# Altium PCB PCB1.PcbDoc
Units mm, origin at the board's own origin, x right, y up, seen from the top; angles counter-clockwise.
Board outline 168.1 x 142.58 mm, 2 copper layers (Top Layer, Bottom Layer); 4 components, 0 nets, 4 pads, 0 vias.
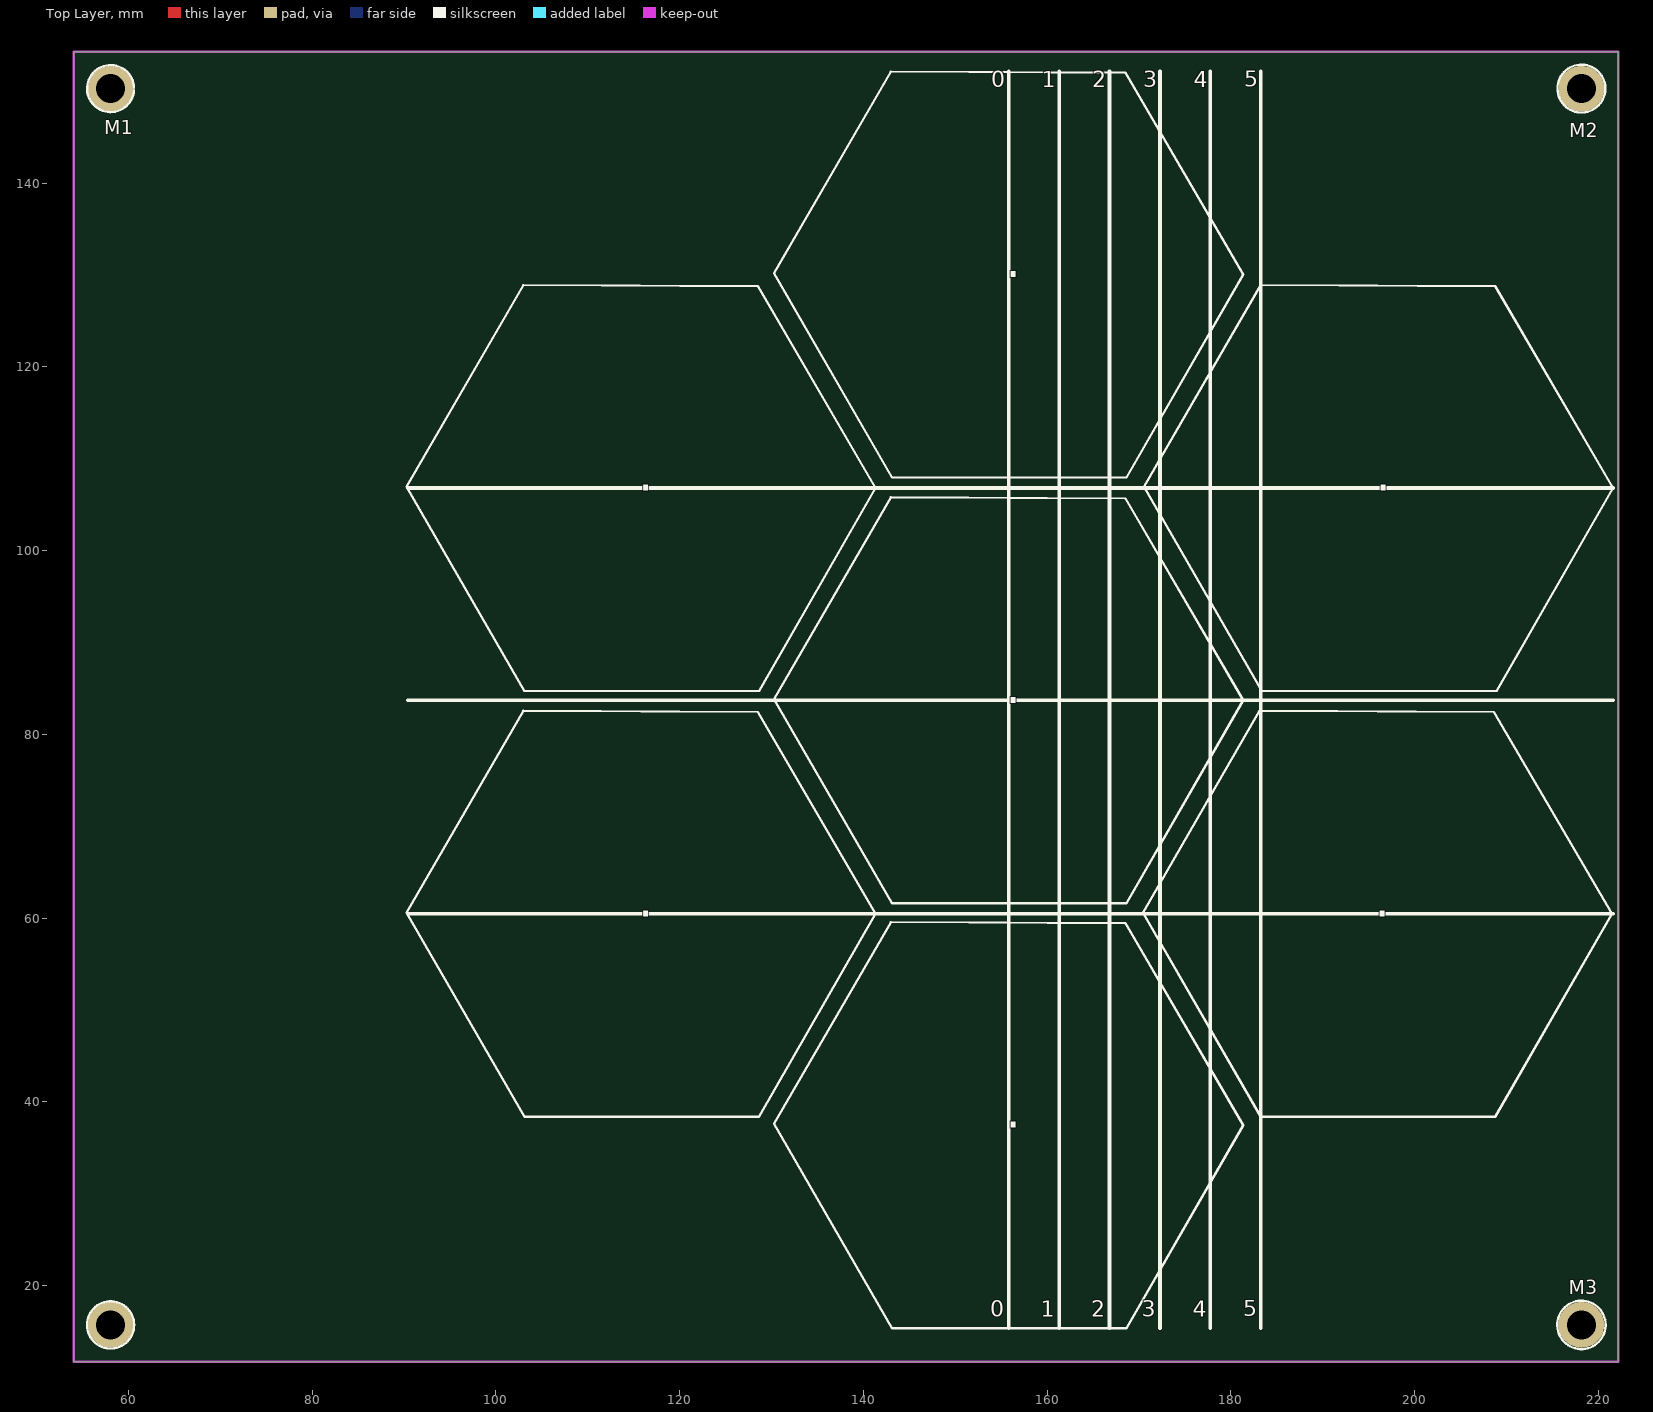
[diagram p0: Top Layer view]
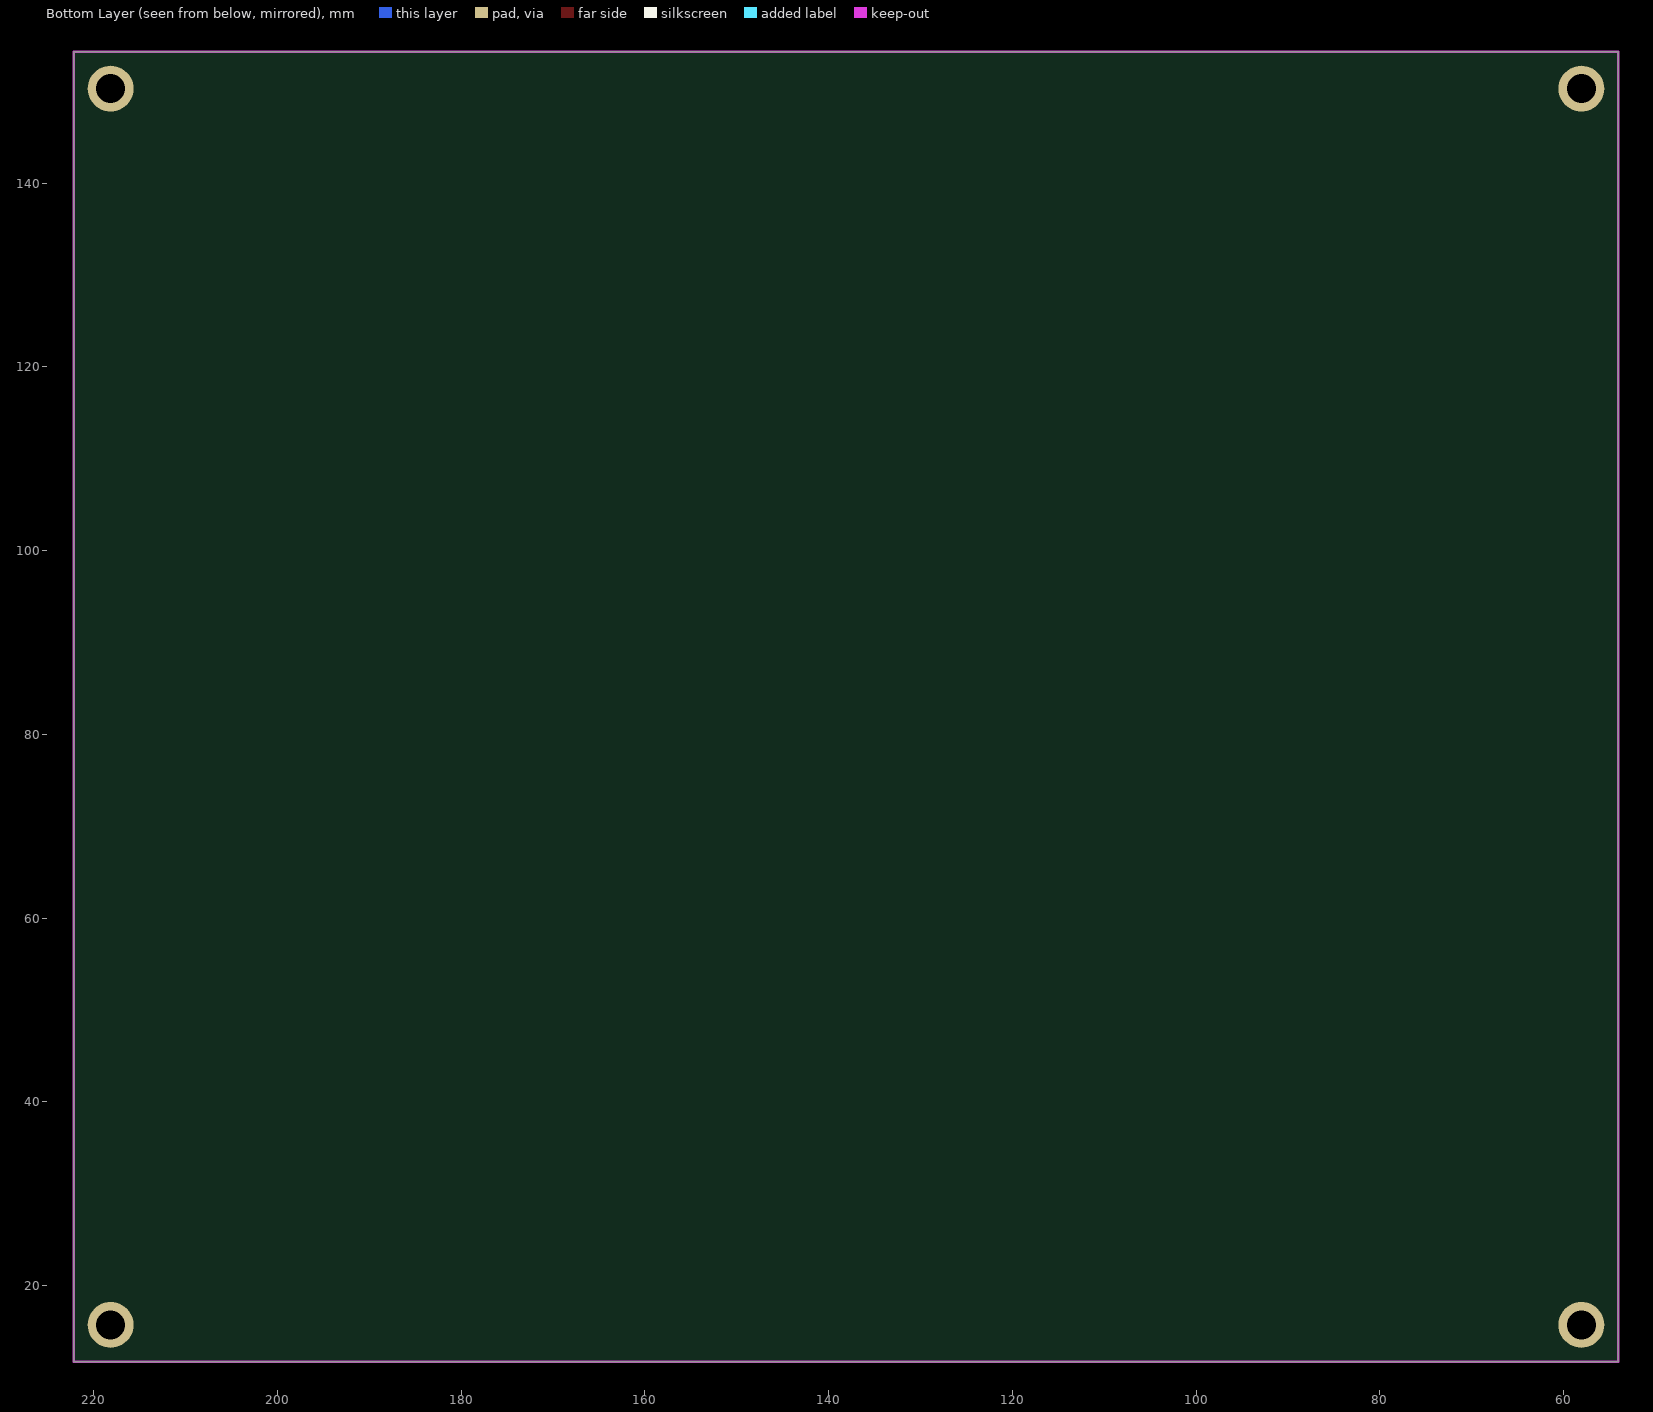
[diagram p1: Bottom Layer view, seen from below]

## Layer stack, top to bottom
Top Solder: solder mask 0.0102, Solder Resist, Dk 3.5
Top Layer: signal copper 0.0356
Dielectric 1: dielectric 0.32, FR-4, Dk 4.8
Bottom Layer: signal copper 0.0356
Bottom Solder: solder mask 0.0102, Solder Resist, Dk 3.5

## Board outline
54.068,11.712 54.068,154.287 222.168,154.287 222.168,11.712

## Design rules (kind name [scope] priority, off if disabled: settings)
Clearance [All] p1: gap=0.254 ignorepadtopadclearanceinfootprint=FALSE except(0: Arc-Hole Track-Hole SMDPad-Hole THPad-Hole Via-Hole Fill-Hole Poly-Hole Region-Hole Text-Hole)
PolygonConnect [All] p1: connectstyle=Relief reliefconductorwidth=0.254 reliefentries=4 polygonreliefangle="90 Angle" airgapwidth=0.254
RoomDefinition HEX1 [InComponentClass('HEX1')] p1 off: confinementstyle=ConfineIn formatcopy=TRUE lockcomponents=FALSE outline 302.708,17.537 360.493,17.537 360.493,71.639 302.708,71.639
RoutingVias [All] p1: holewidth=0.711 width=1.27 viastyle="Through Hole" minholewidth=0.711 minwidth=1.27 maxholewidth=0.711 maxwidth=1.27
SolderMaskExpansion [All] p1: expansion=0.102 istentingtop=FALSE
Width [All] p1: maxlimit=0.254 minlimit=0.254 preferedwidth=0.254
30 further rules are at their usual default settings.

## Components (designator, comment, footprint, x,y, rotation, side; value= is the part's Value field where it differs from the comment)
M1 "Screw" "BOARD SCREW 1"#1 58.068,150.287 r0 top
M2 "Screw" "BOARD SCREW 1"#1 218.168,150.287 r0 top
M3 "Screw" "BOARD SCREW 1"#1 218.168,15.712 r0 top
M4 "Screw" "BOARD SCREW 1"#2 58.068,15.712 r0 top

## Footprints (in the part's own frame and the unit in brackets; to place one, negate y for a bottom-side part, rotate by r counter-clockwise, add the part's x,y. Pads: shape width x height; smd on the part's side, far side on the other; paste and mask are expansions set on the pad)
"BOARD SCREW 1"#1 [mm]
  round 5 hole 3.15 mask+0.1: S(0,0)
  body extent -2.67,-2.64 2.69,2.72, height 2.34
"BOARD SCREW 1"#2 [mm]
  round 5 hole 3.15 mask+0.1: *(0,0)
  body extent -2.67,-2.64 2.69,2.72, height 2.34

## Part data
M1 M2 M3 M4: library part "Board Screw", "Board Screw With Spacer"

## Nets (pads, with @x,y where several pads share a name; then routed paths per layer and width w, separated by ;. In a path a pad name is that pad's centre, name@x,y a point inside that pad or via, vN(x,y) a via of type N, cw(c..) or ccw(c..) an arc to the next point about the centre after c; other vN are vias at no path point)
pads on no net: M1.S M2.S M3.S M4.*

## Keep-outs
Keep-Out Layer:
  the board outline again, w0.254

## Silkscreen, mask and mechanical layers (free items; w line width, h text height)
Top Overlay:
  circle w0.254: c58.068,15.712 r2.573
  lines w0.254: 60.621,150.111 cw(c58.068,150.287) 60.626,150.366 ; 220.776,150.356 ccw(c218.168,150.287) 220.776,150.24 ; 220.802,15.63 cw(c218.168,15.712) 220.803,15.712 ; 90.297,60.579 103.124,38.354 128.651,38.354 141.351,60.452 128.524,82.423 102.997,82.55 90.297,60.579 ; 90.297,106.934 103.124,84.709 128.651,84.709 141.351,106.807 128.524,128.778 102.997,128.905 90.297,106.934 ; 130.302,37.592 143.002,59.563 168.529,59.436 181.356,37.465 168.656,15.367 143.129,15.367 130.302,37.592 ; 130.302,83.82 143.129,61.595 168.656,61.595 181.356,83.693 168.529,105.664 143.002,105.791 130.302,83.82 ; 130.302,130.175 143.129,107.95 168.656,107.95 181.356,130.048 168.529,152.019 143.002,152.146 130.302,130.175 ; 170.434,60.579 183.261,38.354 208.788,38.354 221.488,60.452 208.661,82.423 183.134,82.55 170.434,60.579 ; 170.561,106.934 183.261,128.905 208.788,128.778 221.615,106.807 208.915,84.709 183.388,84.709 170.561,106.934
  lines w0.4: 90.424,60.452 221.615,60.452 ; 90.424,83.693 221.615,83.693 ; 90.424,106.807 221.615,106.807 ; 155.829,15.367 155.829,152.146 ; 161.315,15.367 161.315,152.146 ; 166.802,15.367 166.802,152.146 ; 172.288,15.367 172.288,152.146 ; 177.775,15.367 177.775,152.146 ; 183.261,15.367 183.261,152.146
  text "5" at 181.483,149.891 h3
  text "0" at 153.924,149.854 h3
  text "1" at 159.436,149.854 h3
  text "2" at 164.948,149.854 h3
  text "3" at 170.459,149.854 h3
  text "4" at 175.971,149.854 h3
  text "." at 155.521,129.74 h3.81
  text "." at 115.516,106.499 h3.81
  text "." at 195.78,106.499 h3.81
  text "." at 155.521,83.385 h3.81
  text "." at 115.516,60.144 h3.81
  text "." at 195.653,60.144 h3.81
  text "." at 155.521,37.157 h3.81
  text "5" at 181.356,16.033 h3
  text "0" at 153.797,15.996 h3
  text "1" at 159.309,15.996 h3
  text "2" at 164.821,15.996 h3
  text "3" at 170.332,15.996 h3
  text "4" at 175.844,15.996 h3